# Altium PCB imu-pcb.PcbDoc
Units mm, origin at the board's own origin, x right, y up, seen from the top; angles counter-clockwise.
Board outline 16 x 16 mm, 2 copper layers (Top Layer, Bottom Layer); 8 components, 12 nets, 56 pads, 26 vias.
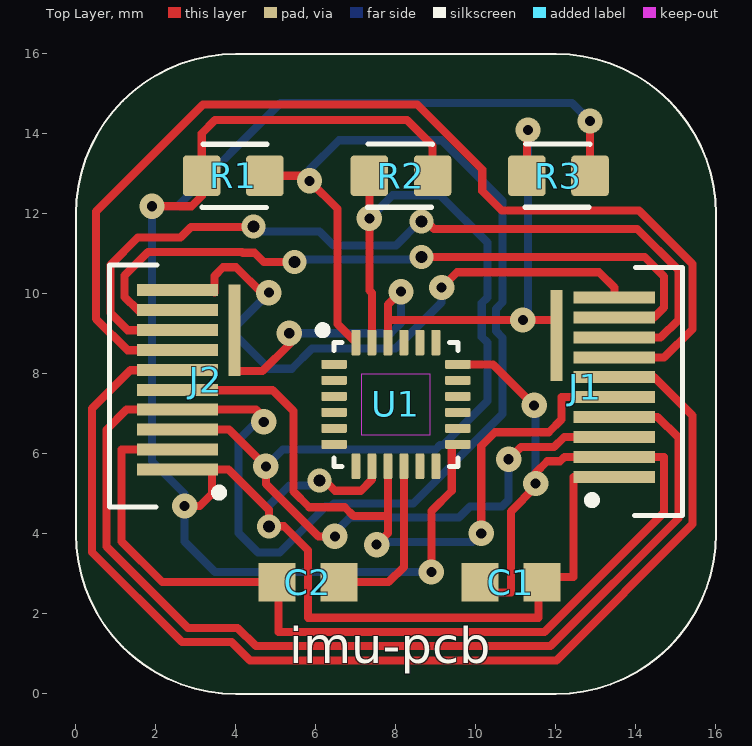
[diagram p0: Top Layer view]
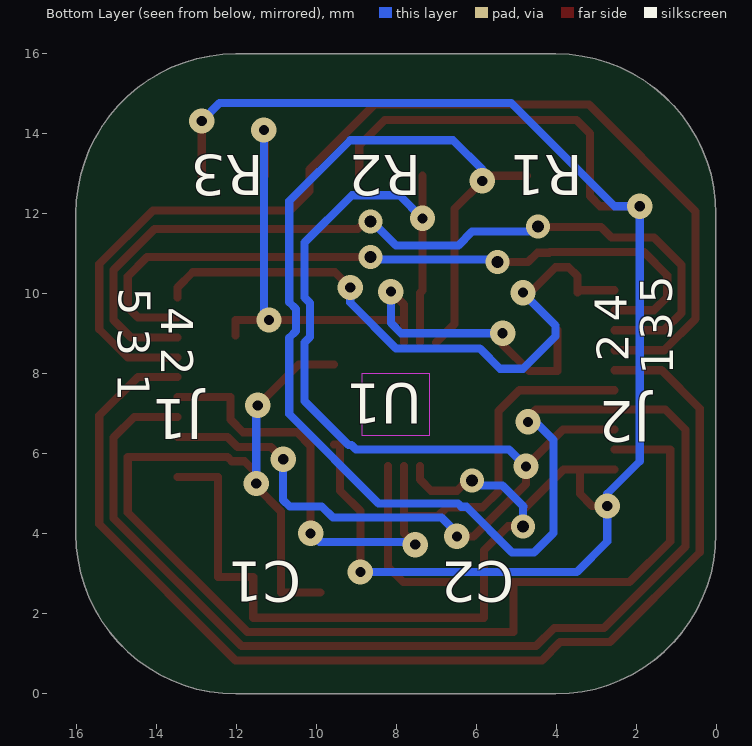
[diagram p1: Bottom Layer view, seen from below]
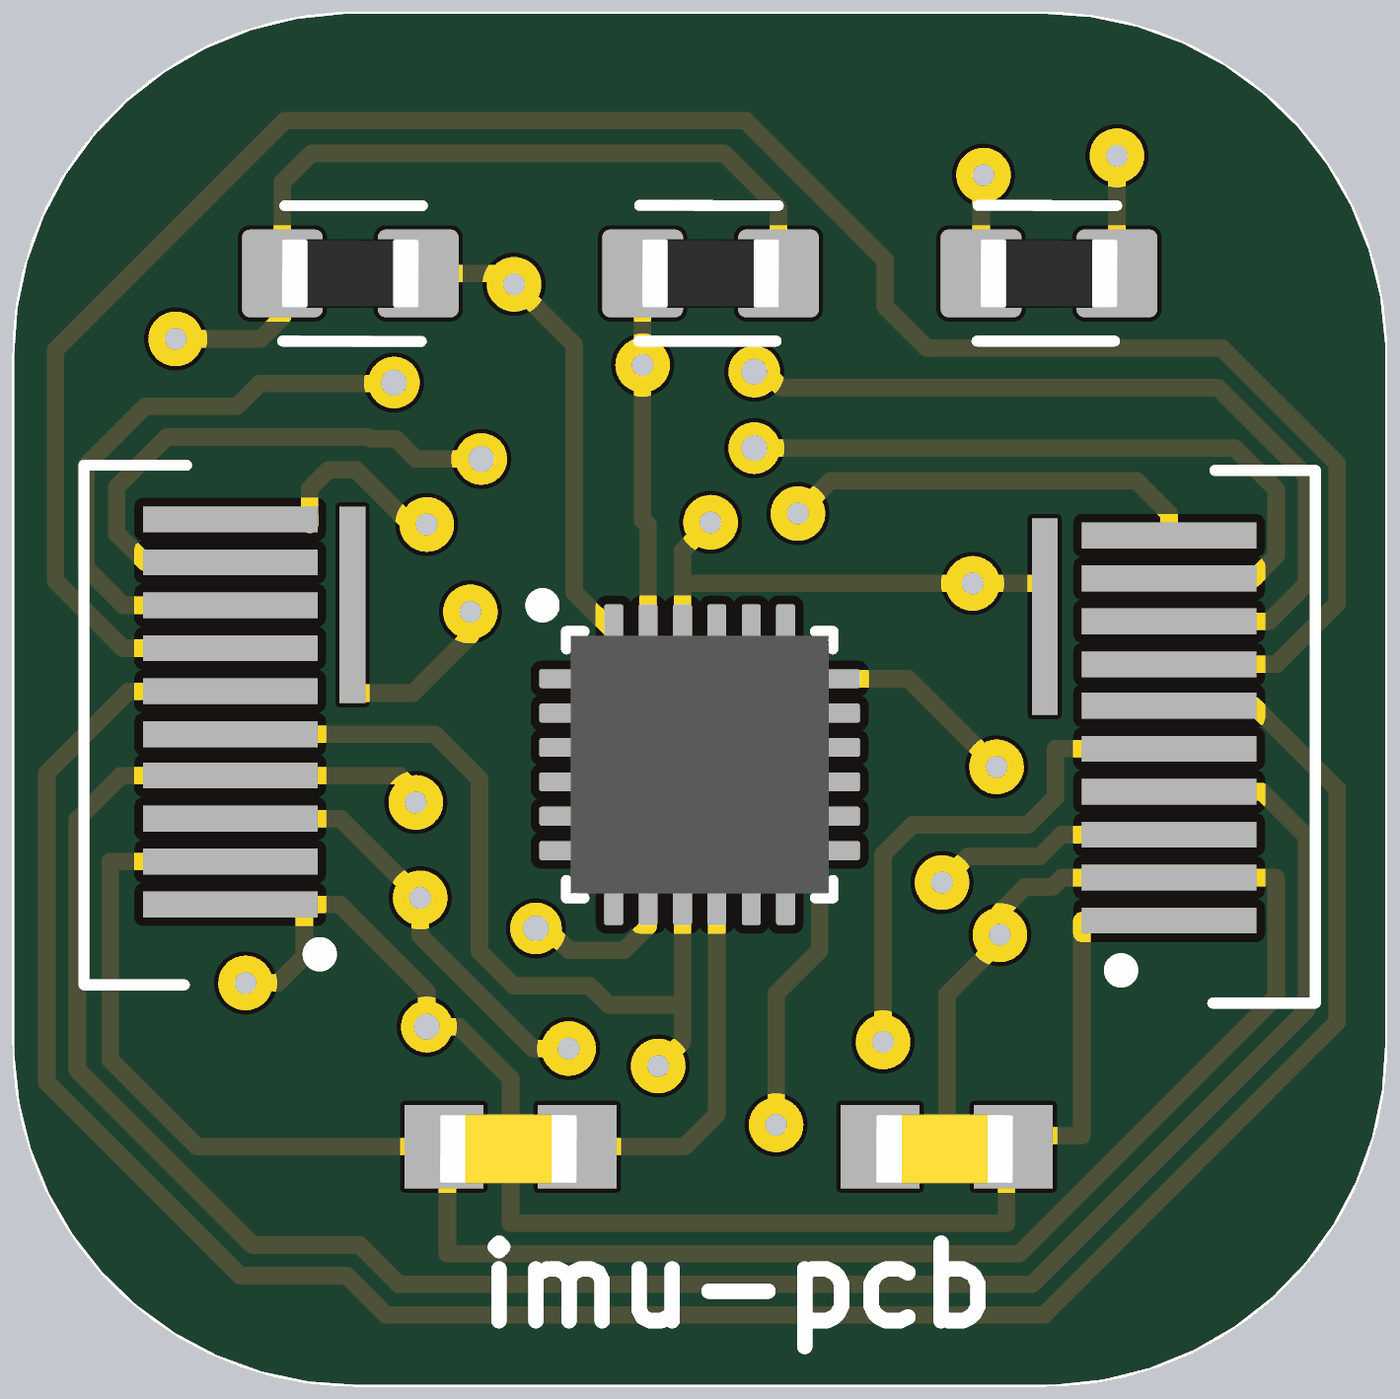
[diagram p2: 3D render of the assembled board from above, using the file's embedded part models]

## Layer stack, top to bottom
Top Solder: solder mask 0.0102, Solder Resist, Dk 3.5
Top Layer: signal copper 0.0356
Dielectric 1: dielectric 0.32, FR-4, Dk 4.8
Bottom Layer: signal copper 0.0356
Bottom Solder: solder mask 0.0102, Solder Resist, Dk 3.5

## Board outline
4.002,0 cw(c4.002,4) 0.002,4 0.002,12 cw(c4.002,12) 4.002,16 12.002,16 cw(c12.002,12) 16.002,12 16.002,4 cw(c12.002,4) 12.002,0

## Design rules (kind name [scope] priority, off if disabled: settings)
Clearance [All] p1: gap=0.254 ignorepadtopadclearanceinfootprint=FALSE except(0: Arc-Hole Track-Hole SMDPad-Hole THPad-Hole Via-Hole Fill-Hole Poly-Hole Region-Hole Text-Hole; 0.127: Arc-SMDPad Track-SMDPad SMDPad-SMDPad; 0.152: Arc-Arc Arc-Track Track-Track; 0.2: Arc-THPad Track-THPad; 0.54: SMDPad-THPad)
HoleSize [All] p1: absolutevalues=TRUE maxlimit=6.3 minlimit=0.2 maxpercent=80.000 minpercent=20.000
HoleToHoleClearance [All] p1: gap=0.54 allowstackedmicrovias=TRUE
MinimumAnnularRing [All] p1: minimumring=0.15
MinimumSolderMaskSliver [All] p1: minsoldermaskwidth=0.1
PolygonConnect [All] p1: connectstyle=Relief reliefconductorwidth=0.254 reliefentries=4 polygonreliefangle="90 Angle" airgapwidth=0.254
RoutingVias [All] p1: holewidth=0.254 width=0.635 viastyle="Through Hole" minholewidth=0.2 minwidth=0.45 maxholewidth=0.711 maxwidth=1.27
SilkToSilkClearance [All] p1: silktosilkclearance=0.15
SilkToSolderMaskClearance [IsPad] p1: minsilkscreentomaskgap=0.127 clearancetoexposedcopper=TRUE
SolderMaskExpansion [All] p1: expansion=0.05
UnRoutedNet [All] p1: checkbadconnections=TRUE
Width [All] p1: maxlimit=0.254 minlimit=0.203 preferedwidth=0.203
24 further rules are at their usual default settings.

## Components (designator, comment, footprint, x,y, rotation, side; value= is the part's Value field where it differs from the comment)
C1 "0.1uF" CAPC1608X87N 10.875,2.794 r180 top
C2 "0.1uF" CAPC1608X87N 5.802,2.794 r180 top
J1 "FPC_10_0.5" FPC_10_0.5 13.462,6.675 r90 top
J2 "FPC_10_0.5" FPC_10_0.5_1 2.54,8.843 r270 top
R1 "10K" RESC1608X50N 3.937,12.954 r180 top
R2 "10K" RESC1608X50N 8.128,12.954 r0 top
R3 "10K" RESC1608X50N 12.065,12.954 r0 top
U1 "MPU-9250" QFN40P300X300X105-24N 8.001,7.239 r0 top

## Footprints (in the part's own frame and the unit in brackets; to place one, negate y for a bottom-side part, rotate by r counter-clockwise, add the part's x,y. Pads: shape width x height; smd on the part's side, far side on the other; paste and mask are expansions set on the pad)
CAPC1608X87N [mm]
  rect 0.92x0.97 smd: 1(-0.775,0) 2(0.775,0)
  body extent -0.77,-0.37 0.83,0.43, height 0.5
FPC_10_0.5 [mm]
  rect 0.3x2.032 smd mask+0.102: 1(-1.25,0) 2(-0.75,0) 3(-0.25,0) 4(0.25,0) 5(0.75,0) 6(1.25,0) 7(1.731,0) 8(2.231,0) 9(2.731,0) 10(3.231,0)
  rect 2.286x0.3 smd: 11(2.286,1.448)
  silkscreen extent -2.21,-1.7 3.99,0.66
FPC_10_0.5_1 [mm]
  rect 0.3x2.032 smd mask+0.102: 1(3.231,0) 2(2.731,0) 3(2.231,0) 4(1.731,0) 5(1.25,0) 6(0.75,0) 7(0.25,0) 8(-0.25,0) 9(-0.75,0) 10(-1.25,0)
  rect 2.286x0.3 smd: 11(-0.254,1.422)
  silkscreen extent -1.88,-1.7 4.17,1.14
QFN40P300X300X105-24N [mm]
  rrect25% 0.64x0.22 smd mask+0.102: 1(-1.545,1) 2(-1.545,0.6) 3(-1.545,0.2) 4(-1.545,-0.2) 5(-1.545,-0.6) 6(-1.545,-1) 13(1.545,-1) 14(1.545,-0.6) 15(1.545,-0.2) 16(1.545,0.2) 17(1.545,0.6) 18(1.545,1)
  rrect25% 0.22x0.64 smd mask+0.102: 7(-1,-1.545) 8(-0.6,-1.545) 9(-0.2,-1.545) 10(0.2,-1.545) 11(0.6,-1.545) 12(1,-1.545) 19(1,1.545) 20(0.6,1.545) 21(0.2,1.545) 22(-0.2,1.545) 23(-0.6,1.545) 24(-1,1.545)
  Keep-Out Layer region: 0.85,-0.77 -0.85,-0.77 -0.85,0.77 0.85,0.77
  Keep-Out Layer region: 0.85,-0.77 -0.85,-0.77 -0.85,0.77 0.85,0.77
  silkscreen extent -1.93,-1.55 1.55,1.95, body extent -1.5,-1.5 1.5,1.5, height 1.1
RESC1608X50N [mm]
  rrect20% 0.94x1.02 smd: 1(-0.79,0) 2(0.79,0)
  silkscreen extent -0.84,-0.79 0.79,0.79, body extent -0.8,-0.4 0.8,0.4, height 0.45

## Part data
C1 C2: library part 0603B103K500CT, "10000pF ±10% 50V Ceramic Capacitor X7R 0603 (1608 Metric)", Package="0603 Walsin Technologies", Availability=Unavailable, DigiKey-Purchase-URL=https://snapeda.com/shop?store=DigiKey&id=424904, MF="Walsin Technology", Mouser-Purchase-URL=https://snapeda.com/shop?store=Mouser&id=424904, MP=0603B103K500CT, Price=None, SnapEDA_Link=https://www.snapeda.com/parts/0603B103K500CT/Walsin%20Technology%20Corporation/view-part/424904/?ref=snap
J1: "6 Position FPC Connector Contacts, Bottom 0.020 (0.50mm) Surface Mount, Right Angle", Package=None, Availability=Unavailable, MF="TE Connectivity", MP=1734592-6, Price=None, SnapEDA_Link=https://www.snapeda.com/parts/1734592-6/TE%20Connectivity/view-part/4788517/?ref=snap
J2: library part FPC_10_0.5_1, "6 Position FPC Connector Contacts, Bottom 0.020 (0.50mm) Surface Mount, Right Angle", Package=None, Availability=Unavailable, MF="TE Connectivity", MP=1734592-6, Price=None, SnapEDA_Link=https://www.snapeda.com/parts/1734592-6/TE%20Connectivity/view-part/4788517/?ref=snap
R1 R2 R3: library part RES-0603, "RES SMD 10 OHM 0.1% 1/16W 0603", Package=0603, Power_Rating=".063 W", Resistance=10, Tolerance=.1%, Voltage_Rating="50 V", Availability=Warning, EU_RoHS_Compliance=Compliant, MF="TE Connectivity", MP=8-1614350-7, Price=None, SnapEDA_Link=https://www.snapeda.com/parts/8-1614350-7/TE%20Connectivity/view-part/2208042/?ref=snap
U1: "Accelerometer, Gyroscope, Magnetometer, 9 Axis Sensor I²C, SPI Output", Package="TFQFN-24 TDK InvenSense", Availability=Unavailable, MF="TDK InvenSense", MP=MPU-9250, Price=None, SnapEDA_Link=https://www.snapeda.com/parts/MPU-9250/TDK%20InvenSense/view-part/4652549/?ref=snap

## Via types
v1: diameter 0.635, hole 0.254, Top Layer to Bottom Layer, 20 vias
v2: diameter 0.6, hole 0.3, Top Layer to Bottom Layer, 6 vias

## Nets (pads, with @x,y where several pads share a name; then routed paths per layer and width w, separated by ;. In a path a pad name is that pad's centre, name@x,y a point inside that pad or via, vN(x,y) a via of type N, cw(c..) or ccw(c..) an arc to the next point about the centre after c; other vN are vias at no path point)
3V3: C1.1 J1.1 J2.1 R1.2 R2.2 R3.2 U1.8 U1.13 | length 64.7
  Top Layer w0.203: v1(1.905,12.192) 2.896,12.192 3.147,12.443 R1.2 3.147,14.015 3.483,14.351 8.282,14.351 8.918,13.715 R2.2 ; J2.1 J2.1@3.404,5.612 ; v1(2.718,4.699) 3.099,4.699 3.404,5.004 J2.1@3.404,5.612 ; v2(6.096,5.334) 6.223,5.334 6.477,5.08 7.124,5.08 7.401,5.357 U1.8 ; v1(8.89,3.048) 8.89,4.572 9.398,5.08 9.398,6.239 U1.13 ; R3.2 v1(12.855,14.323) ; J1.1 12.446,5.425 12.446,2.921 11.57,2.921 11.57,1.905 5.802,1.905 5.802,3.593 5.204,4.191 v2(4.826,4.191) 4.826,4.601 3.815,5.612 J2.1@3.404,5.612
  Bottom Layer w0.203: v2(4.826,4.191) 4.826,4.663 4.808,4.681 5.334,5.207 5.969,5.207 v2(6.096,5.334) ; v1(8.89,3.048) 3.48,3.048 2.718,3.81 v1(2.718,4.699) 2.718,5.004 1.905,5.817 v1(1.905,12.192) 2.54,12.192 5.118,14.77 12.408,14.77 v1(12.855,14.323)
CS: J1.11 J2.11 R3.1 U1.22 | length 18.7
  Top Layer w0.203: J2.11 3.962,8.071 4.668,8.071 5.334,8.738 v1(5.334,9.017) ; U1.22 7.801,9.347 ; v1(8.128,10.058) 7.801,9.731 7.801,9.347 ; R3.1 11.275,14.069 v1(11.303,14.097) ; J1.11 12.014,9.347 v1(11.176,9.347) 7.801,9.347
  Bottom Layer w0.203: v1(5.334,9.017) 7.874,9.017 8.128,9.271 v1(8.128,10.058) ; v1(11.176,9.347) 11.252,9.347 11.303,9.398 v1(11.303,14.097)
CS_1: J1.6 J2.6 | length 28.7
  Top Layer w0.203: J2.6 1.362,8.093 0.406,7.137 0.406,3.541 2.652,1.295 3.896,1.295 4.354,0.838 12.012,0.838 15.418,4.244 15.418,6.958 14.451,7.925 J1.6
CS_2: J1.7 J2.7 | length 26.9
  Top Layer w0.203: J2.7 1.292,8.593 0.508,9.378 0.508,12.065 3.175,14.732 8.534,14.732 10.16,13.106 10.16,12.573 10.647,12.086 14.076,12.086 15.418,10.744 15.418,9.117 14.707,8.406 J1.7
CS_3: J1.8 J2.8 | length 21.6
  Top Layer w0.203: J2.8 1.295,9.093 0.864,9.525 0.864,10.724 1.547,11.407 2.614,11.407 2.878,11.671 v2@4.445,11.671 ; v2(8.636,11.811) 8.768,11.811 8.956,11.623 14.036,11.623 15.062,10.597 15.062,9.347 14.621,8.906 J1.8
  Bottom Layer w0.203: v2(4.445,11.684) 4.572,11.557 6.096,11.557 6.439,11.214 8.001,11.214 8.598,11.811 v2(8.636,11.811)
CS_4: J1.9 J2.9 | length 18.2
  Top Layer w0.203: J2.9 1.551,9.593 1.219,9.925 1.219,10.465 1.803,11.049 4.153,11.049 4.173,11.028 4.466,11.028 4.699,10.795 v2(5.461,10.795) ; v2(8.636,10.922) 14.224,10.922 14.707,10.439 14.707,9.661 14.451,9.406 J1.9
  Bottom Layer w0.203: v2(5.461,10.795) 5.524,10.858 8.572,10.858 v2(8.636,10.922)
CS_5: J1.10 J2.10 | length 15.9
  Top Layer w0.203: J2.10 3.404,10.093 3.464,10.033 3.464,10.449 3.683,10.668 4.008,10.668 4.643,10.033 v1(4.826,10.033) ; v1(9.144,10.16) 9.525,10.541 13.081,10.541 13.462,10.16 J1.10
  Bottom Layer w0.203: v1(4.826,10.033) 4.826,10.027 4.013,9.214 4.013,8.941 4.826,8.128 5.397,8.128 5.905,8.636 7.996,8.636 9.144,9.784 v1(9.144,10.16)
GND: C1.2 C2.2 J1.2 J2.2 U1.18 | length 33.5
  Top Layer w0.203: J2.2 1.143,6.112 1.143,3.81 2.159,2.794 C2.2 5.067,2.794 5.067,1.549 11.717,1.549 14.707,4.539 14.707,5.925 J1.2 12.214,5.925 12.106,5.817 11.786,5.817 11.493,5.524 v1(11.493,5.26) 11.493,5.182 10.875,4.564 10.875,2.54 C1.2@9.893,2.54 ; U1.18 10.43,8.239 v1(11.455,7.214)
  Bottom Layer w0.203: v1(11.455,7.214) 11.493,7.175 v1(11.493,5.26)
MISO: J1.5 J2.5 U1.9 | length 18.9
  Top Layer w0.203: J2.5 4.916,7.593 5.44,7.069 5.44,5.062 5.836,4.667 6.724,4.667 6.946,4.445 7.801,4.445 ; v1(7.518,3.734) 7.801,4.016 7.801,4.445 ; U1.9 7.801,4.445 ; v1(10.135,4.013) 10.135,6.198 10.477,6.54 11.824,6.54 12.141,6.858 12.141,7.425 J1.5
  Bottom Layer w0.203: v1(7.518,3.734) 7.578,3.794 9.915,3.794 v1(10.135,4.013)
MOSI: J1.4 J2.4 R1.1 U1.24 | length 56.5
  Top Layer w0.203: v1(4.699,6.799) 4.816,6.799 4.504,7.112 J2.4 1.27,7.112 0.762,6.604 0.762,3.688 2.799,1.651 4.044,1.651 4.501,1.194 11.865,1.194 15.062,4.391 15.062,6.407 14.545,6.925 J1.4 ; R1.1 5.715,12.954 v1(5.842,12.827) 6.54,12.128 6.54,9.244 U1.24
  Bottom Layer w0.203: v1(4.699,6.799) 4.513,6.799 4.064,6.35 4.064,4.026 4.554,3.535 5.098,3.535 6.241,4.678 6.368,4.678 6.452,4.763 8.437,4.763 10.668,6.994 10.668,8.903 10.503,9.068 10.503,9.626 10.668,9.791 10.668,12.319 9.144,13.843 6.579,13.843 5.842,13.106 v1(5.842,12.827)
NetC2_1: C2.1 U1.10 | length 4.3
  Top Layer w0.203: C2.1 7.82,2.794 8.201,3.175 U1.10
SCK: J1.3 J2.3 R2.1 U1.23 | length 33.6
  Top Layer w0.203: J2.3 3.827,6.612 ; v1(6.477,3.937) 6.063,3.937 4.75,5.25 v1(4.75,5.69) ; R2.1 v1(7.338,11.887) 7.338,10.085 7.401,10.022 U1.23 ; v1(10.82,5.867) 11.125,6.172 11.958,6.172 12.211,6.425 J1.3 ; 3.827,6.612 v1(4.75,5.69) ; 3.827,6.612 v1(4.75,5.69)
  Bottom Layer w0.203: v1(4.75,5.69) 5.174,6.113 8.998,6.113 9.108,6.223 9.186,6.223 10.287,7.324 10.287,8.781 10.147,8.921 10.147,9.773 10.287,9.913 10.287,11.283 9.103,12.467 7.917,12.467 v1(7.338,11.887) ; v1(6.477,3.937) 6.388,3.937 6.858,4.407 9.576,4.407 9.856,4.686 10.655,4.686 10.82,4.851 v1(10.82,5.867)
pads on no net: U1.1 U1.2 U1.3 U1.4 U1.5 U1.6 U1.7 U1.11 U1.12 U1.14 U1.15 U1.16 U1.17 U1.19 U1.20 U1.21

## Silkscreen, mask and mechanical layers (free items; w line width, h text height)
Top Overlay:
  the board outline again, w0.05
  text "imu-pcb" at 5.334,0.762 h0.9
Mechanical 10:
  lines w0.013: 0.002,4 ccw(c4.002,4) 4.002,0 ; 0.002,4 ccw(c4.002,4) 4.002,0 ; 0.002,4 0.002,12 ; 0.002,4 0.002,12 ; 0.002,12 cw(c4.002,12) 4.002,16 ; 0.002,12 cw(c4.002,12) 4.002,16 ; 4.002,0 12.002,0 ; 4.002,0 12.002,0 ; 4.002,16 12.002,16 ; 4.002,16 12.002,16 ; 12.002,0 ccw(c12.002,4) 16.002,4 ; 12.002,0 ccw(c12.002,4) 16.002,4 ; 12.002,16 cw(c12.002,12) 16.002,12 ; 12.002,16 cw(c12.002,12) 16.002,12 ; 16.002,4 16.002,12 ; 16.002,4 16.002,12

## Text inside footprints (layer, text, board x,y; h text height)
J1: Bottom Overlay "5" at 14.935,10.155 h0.8 r90; Bottom Overlay "4" at 13.868,9.672 h0.8 r90; Bottom Overlay "3" at 14.961,9.139 h0.8 r90; Bottom Overlay "1" at 14.961,8.021 h0.8 r90; Bottom Overlay "2" at 13.868,8.656 h0.8 r90
J2: Bottom Overlay "5" at 1.092,9.758 h0.8 r270; Bottom Overlay "4" at 2.235,9.3 h0.8 r270; Bottom Overlay "3" at 1.092,8.843 h0.8 r270; Bottom Overlay "1" at 1.067,7.98 h0.8 r270; Bottom Overlay "2" at 2.184,8.31 h0.8 r270